# EAGLE board smarttle_v1 (EAGLE 8.4.0)
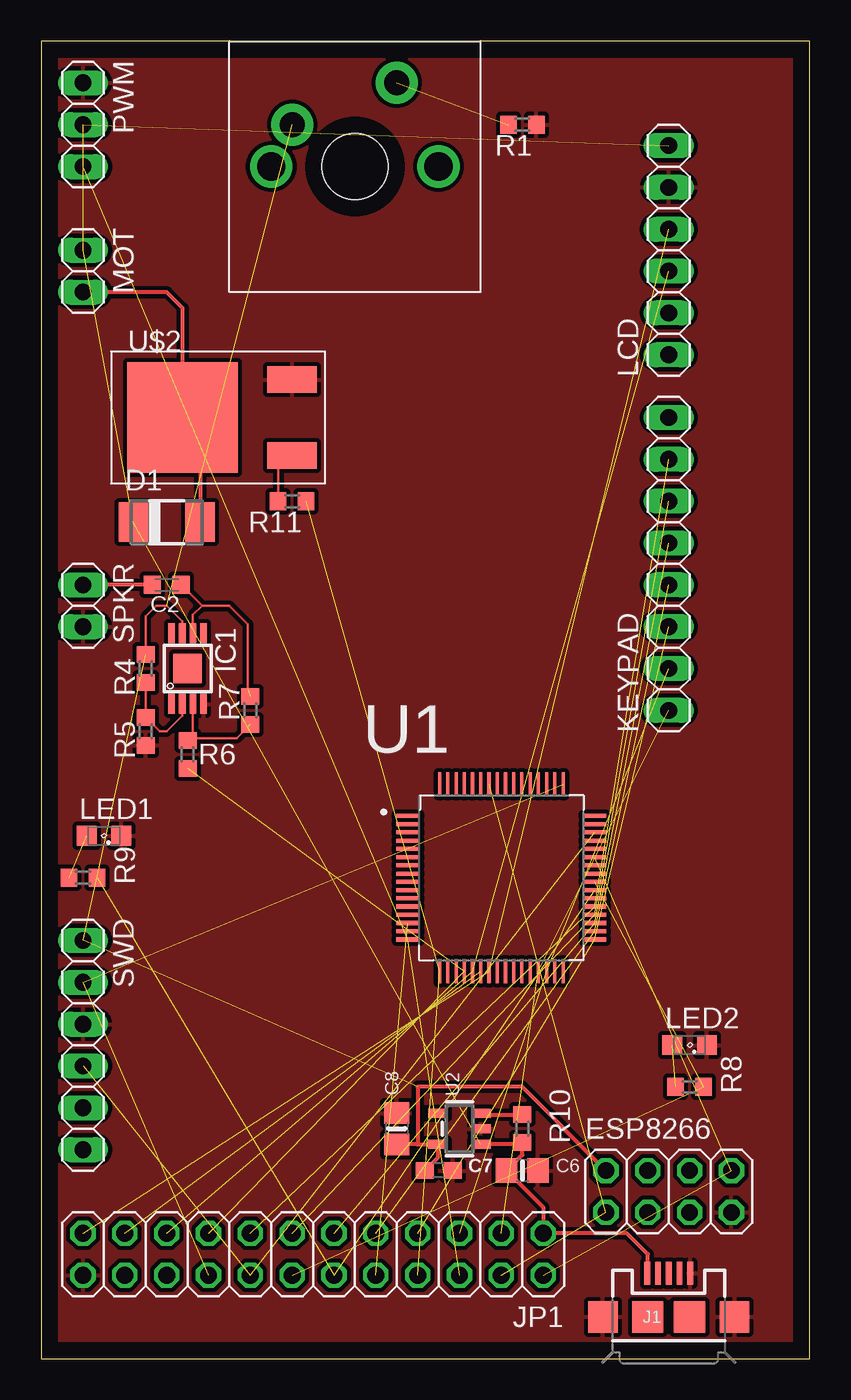
[diagram p0: board, top side]

Size 46.66 x 80 mm. Coordinates in mm from the lower left corner, seen from the top.
Outline: 0,0 46.66,0 46.66,80 0,80 0,0
Copper layers (1*16): Top 0.035mm / dielectric 1.5mm / Bottom 0.035mm
Design rules "default": minimum track width 6mil, minimum drill 0.35mm, track to track 6mil, track to pad 6mil, pad to pad 6mil, via to via 6mil, smd to smd 6mil, copper to edge 40mil, drill to drill 6mil, minimum pad ring 10mil, minimum via ring 8mil, stop-mask expansion 4mil, vias tented up to drill 0mil, thermal gap 10mil

## Footprints (pad centres in the part's own frame; a part is rotated, then mirrored left to right if it is on the bottom)
C0603K = smd 1.05 x 1.08: 1 -0.875,0; 2 0.875,0
0805-NO = smd 1.3 x 1.5: 1 -0.95,0; 2 0.95,0
0603-NO = smd 1.1 x 1: 1 -0.85,0; 2 0.85,0
DO-214AC = smd 1.8 x 2.4: A 2.025,0; C -2.025,0
2X04 = drill 1.016 octagon: 1 -3.81,-1.27; 2 -3.81,1.27; 3 -1.27,-1.27; 4 -1.27,1.27; 5 1.27,-1.27; 6 1.27,1.27; 7 3.81,-1.27; 8 3.81,1.27
S-PDSO-G08 = smd 0.4 x 1.2: 1 -0.975,-2.157; 2 -0.325,-2.157; 3 0.325,-2.157; 4 0.975,-2.157; 5 0.975,2.157; 6 0.325,2.157; 7 -0.325,2.157; 8 -0.975,2.157 | smd 1.73 x 1.78: TH 0,0
USB-MICROB = smd 0.35 x 1.4: D+ 0,2.65; D- -0.65,2.65; GND 1.3,2.65; ID 0.65,2.65; VBUS -1.3,2.65 | smd 1.8 x 1.9: MT1 -4,0; MT2 4,0 | smd 1.9 x 1.9: P$1 -1.27,0; P$2 1.27,0
2X12 = drill 1.016 octagon: 1 -13.97,-1.27; 2 -13.97,1.27; 3 -11.43,-1.27; 4 -11.43,1.27; 5 -8.89,-1.27; 6 -8.89,1.27; 7 -6.35,-1.27; 8 -6.35,1.27; 9 -3.81,-1.27; 10 -3.81,1.27; 11 -1.27,-1.27; 12 -1.27,1.27; 13 1.27,-1.27; 14 1.27,1.27; 15 3.81,-1.27; 16 3.81,1.27; 17 6.35,-1.27; 18 6.35,1.27; 19 8.89,-1.27; 20 8.89,1.27; 21 11.43,-1.27; 22 11.43,1.27; 23 13.97,-1.27; 24 13.97,1.27
1X08 = drill 1.016 long: 1 -8.89,0; 2 -6.35,0; 3 -3.81,0; 4 -1.27,0; 5 1.27,0; 6 3.81,0; 7 6.35,0; 8 8.89,0
1X06 = drill 1.016 long: 1 -6.35,0; 2 -3.81,0; 3 -1.27,0; 4 1.27,0; 5 3.81,0; 6 6.35,0
SML0805 = smd 1.2 x 1.2: A 1.05,0; C -1.05,0
1X02 = drill 1.016 long: 1 -1.27,0; 2 1.27,0
1X03 = drill 1.016 long: 1 -2.54,0; 2 0,0; 3 2.54,0
R0603 = smd 1 x 1.1: 1 -0.85,0; 2 0.85,0
QFP50P1200X1200X160-64N = smd 1.47 x 0.25: 1 -5.67,3.75; 2 -5.67,3.25; 3 -5.67,2.75; 4 -5.67,2.25; 5 -5.67,1.75; 6 -5.67,1.25; 7 -5.67,0.75; 8 -5.67,0.25; 9 -5.67,-0.25; 10 -5.67,-0.75; 11 -5.67,-1.25; 12 -5.67,-1.75; 13 -5.67,-2.25; 14 -5.67,-2.75; 15 -5.67,-3.25; 16 -5.67,-3.75; 33 5.67,-3.75; 34 5.67,-3.25; 35 5.67,-2.75; 36 5.67,-2.25; 37 5.67,-1.75; 38 5.67,-1.25; 39 5.67,-0.75; 40 5.67,-0.25; 41 5.67,0.25; 42 5.67,0.75; 43 5.67,1.25; 44 5.67,1.75; 45 5.67,2.25; 46 5.67,2.75; 47 5.67,3.25; 48 5.67,3.75 | smd 0.25 x 1.47: 17 -3.75,-5.67; 18 -3.25,-5.67; 19 -2.75,-5.67; 20 -2.25,-5.67; 21 -1.75,-5.67; 22 -1.25,-5.67; 23 -0.75,-5.67; 24 -0.25,-5.67; 25 0.25,-5.67; 26 0.75,-5.67; 27 1.25,-5.67; 28 1.75,-5.67; 29 2.25,-5.67; 30 2.75,-5.67; 31 3.25,-5.67; 32 3.75,-5.67; 49 3.75,5.67; 50 3.25,5.67; 51 2.75,5.67; 52 2.25,5.67; 53 1.75,5.67; 54 1.25,5.67; 55 0.75,5.67; 56 0.25,5.67; 57 -0.25,5.67; 58 -0.75,5.67; 59 -1.25,5.67; 60 -1.75,5.67; 61 -2.25,5.67; 62 -2.75,5.67; 63 -3.25,5.67; 64 -3.75,5.67
SOT23-5 = smd 0.55 x 1.2: 1 -0.95,-1.3; 2 0,-1.3; 3 0.95,-1.3; 4 0.95,1.3; 5 -0.95,1.3
CHERRY-MX = drill 1.714 pad 1.93: P$3 -5.08,0; P$4 5.08,0 | drill 1.5 pad 2.54: SW1 -3.81,2.54; SW2 2.54,5.08 | hole 4: 0,0
DPAK = smd 6.7 x 6.7: P$1 -6.65,0 | smd 3 x 1.6: P$2 0,2.3; P$3 0,-2.3

## Placement (x,y rotation side)
C2  10uF  [C0603K]  7.62,46.99 180 top
C6  10µF  [0805-NO]  29.21,11.43 0 top
C7  1uF  [0603-NO]  24.13,11.43 0 top
C8  10µF  [0805-NO]  21.59,13.97 90 top
D1  [DO-214AC]  7.62,50.8 0 top
ESP8266  [2X04]  38.1,10.16 0 top
IC1  THS4211  [S-PDSO-G08]  8.89,41.91 0 top
J1  USB-MICROB  [USB-MICROB]  38.1,2.54 0 top
JP1  [2X12]  16.51,6.35 180 top
KEYPAD  [1X08]  38.1,48.26 90 top
LCD  [1X06]  38.1,67.31 90 top
LED1  [SML0805]  3.81,31.75 180 top
LED2  [SML0805]  39.37,19.05 180 top
MOT  [1X02]  2.54,66.04 270 top
PWM  [1X03]  2.54,74.93 270 top
R1  [R0603]  29.21,74.93 180 top
R4  [R0603]  6.35,41.91 270 top
R5  [R0603]  6.35,38.1 270 top
R6  [R0603]  8.89,36.7 90 top
R7  [R0603]  12.7,39.37 90 top
R8  [R0603]  39.37,16.51 0 top
R9  [R0603]  2.54,29.21 0 top
R10  100k  [R0603]  29.21,13.97 90 top
R11  [R0603]  15.24,52.07 180 top
SPKR  [1X02]  2.54,45.72 270 top
SWD  [1X06]  2.54,19.05 270 top
U1  STM32F0_LQFP64  [QFP50P1200X1200X160-64N]  27.94,29.21 0 top
U2  SPX3819-3.3  [SOT23-5]  25.4,13.97 90 top
U$1  CHERRY-MX  [CHERRY-MX]  19.05,72.39 0 top
U$2  STD20NF06L  [DPAK]  15.24,57.15 0 top

## Library data of the parts
C2 R1 R4-R9 R11 = resistor
C6-C8 U2 = microbuilder
D1 = diode
ESP8266 JP1 KEYPAD LCD MOT PWM SPKR SWD = pinhead
IC1 = texas; MF: TEXAS INSTRUMENT CONNECTORS; MPN: THS4211DGK; OC_FARNELL: 8453306; OC_NEWARK: 95H4489
J1 = SparkFun-Connectors; PROD_ID: CONN-09505
LED1 LED2 = led
R10 = adafruit
U1 U$2 = smarttle
U$1 = cherrymx

## Nets
+3V3: C7.1 C8.1 ESP8266.2 IC1.7 R4.1 SWD.1 U2.5 U$1.SW1
+5V: C6.1 D1.C J1.VBUS JP1.1 LCD.6 MOT.1 PWM.2 R10.1 U2.1
AMP: IC1.3 R6.2 R7.1
CH_PD: ESP8266.6
COL1: JP1.11 KEYPAD.5 U1.35
COL2: JP1.13 KEYPAD.6 U1.36
COL3: JP1.15 KEYPAD.7 U1.37
D+: J1.D+
D-: J1.D-
DAC: JP1.17 R6.1 U1.20
EN: R10.2 U2.3
ESP_GPIO0: ESP8266.3
ESP_GPIO1: ESP8266.5
GND: C6.2 C7.2 C8.2 ESP8266.7 IC1.4 J1.GND J1.MT1 J1.MT2 JP1.24 LCD.5 LED1.C LED2.C PWM.1 R1.1 R5.2 SPKR.2 SWD.3 U2.2 U$2.P$2
KETTLESWITCH: R1.2 U$1.SW2
LED3: JP1.12 R9.2 U1.39
LED4: JP1.14 R8.2 U1.40
MISO: JP1.21 U1.22
MOSI: JP1.23 LCD.4 U1.23
MOT-: D1.A MOT.2 U$2.P$1
N$1: LED2.A R8.1
N$2: LCD.2
N$3: LED1.A R9.1
N$4: R11.2 U$2.P$3
N$7: IC1.2 R4.2 R5.1
N$16: C2.2 SPKR.1
N$17: C2.1 IC1.6 R7.2
N$22: JP1.22
N$23: JP1.20
NRST: SWD.5
PUSH_BUTT: JP1.10 U1.14
ROW1: JP1.3 KEYPAD.1 U1.29
ROW2: JP1.5 KEYPAD.2 U1.30
ROW3: JP1.7 KEYPAD.3 U1.33
ROW4: JP1.9 KEYPAD.4 U1.34
RST: ESP8266.4
SCK: JP1.19 LCD.3 U1.21
SPISS: LCD.1
SWCLK: JP1.18 SWD.2 U1.49
SWDIO: JP1.16 SWD.4 U1.46
SWO: SWD.6
TIM2_CH3: JP1.6 PWM.3 U1.16
TIM2_CH4: JP1.8 R11.1 U1.17
USART_RX: ESP8266.8 JP1.2 U1.43
USART_TX: ESP8266.1 JP1.4 U1.58

## Tracks (layer width: path | path; a pad name or v marks a point on that pad's centre or on a via)
+3V3  (3 unrouted)
  Top 0.152: IC1.7 8.56,44.77 7.62,45.72 6.99,45.72 6.35,45.09 R4.1
  Top 0.254: C7.1 24.1,12.25 U2.5 22.86,13.02 | 22.86,13.02 C8.1 | ESP8266.2 29.21,16.51 22.86,16.51 22.86,13.02
+5V  (4 unrouted)
  Top 0.254: 34.29,7.62 JP1.1 30.48,9.21 C6.1 29.21,12.38 R10.1 29.11,13.02 U2.1 | 34.29,7.62 34.37,7.62 | J1.VBUS 36.83,5.22 36.83,6.35 35.56,7.62 34.29,7.62
AMP  (1 unrouted)
  Top 0.152: IC1.3 9.21,38.01 9.15,37.91 | 9.15,37.91 R6.2 | 12.55,38.37 11.86,37.68 9.38,37.68 9.15,37.91
COL1  (2 unrouted)
COL2  (2 unrouted)
COL3  (2 unrouted)
DAC  (2 unrouted)
EN
  Top 0.254: U2.3 26.8,14.82 R10.2
GND
  pour Top (isolate 0.254): 0,0 46.99,0 46.99,80.01 0,80.01
KETTLESWITCH  (1 unrouted)
LED3  (2 unrouted)
LED4  (2 unrouted)
MISO  (1 unrouted)
MOSI  (2 unrouted)
MOT-
  Top 0.254: D1.A 9.64,56.09 arc90 U$2.P$1 8.59,63.8 7.62,64.77 MOT.2
N$1  (1 unrouted)
N$3  (1 unrouted)
N$4
  Top 0.152: U$2.P$3 arc90 14.39,54 R11.2
N$7
  Top 0.152: R4.2 R5.1 7.2,38.1 7.62,38.1 8.56,39.05 8.56,39.37 IC1.2
N$16
  Top 0.254: C2.2 SPKR.1
N$17  (1 unrouted)
  Top 0.152: 12.55,40.64 12.55,44.6 11.43,45.72 9.77,45.72 | C2.1 9.77,45.72 | 9.77,45.72 9.21,45.17 IC1.6
PUSH_BUTT  (1 unrouted)
ROW1  (2 unrouted)
ROW2  (2 unrouted)
ROW3  (2 unrouted)
ROW4  (2 unrouted)
SCK  (2 unrouted)
SWCLK  (2 unrouted)
SWDIO  (2 unrouted)
TIM2_CH3  (2 unrouted)
TIM2_CH4  (2 unrouted)
USART_RX  (2 unrouted)
USART_TX  (2 unrouted)